# Altium PCB PCB1.PcbDoc
Units mm, origin at the board's own origin, x right, y up, seen from the top; angles counter-clockwise.
Board outline 152.4 x 101.6 mm, 2 copper layers (Top Layer, Bottom Layer); 22 components, 15 nets, 106 pads, 0 vias.
Unrouted connection lines stored in the file: 32.
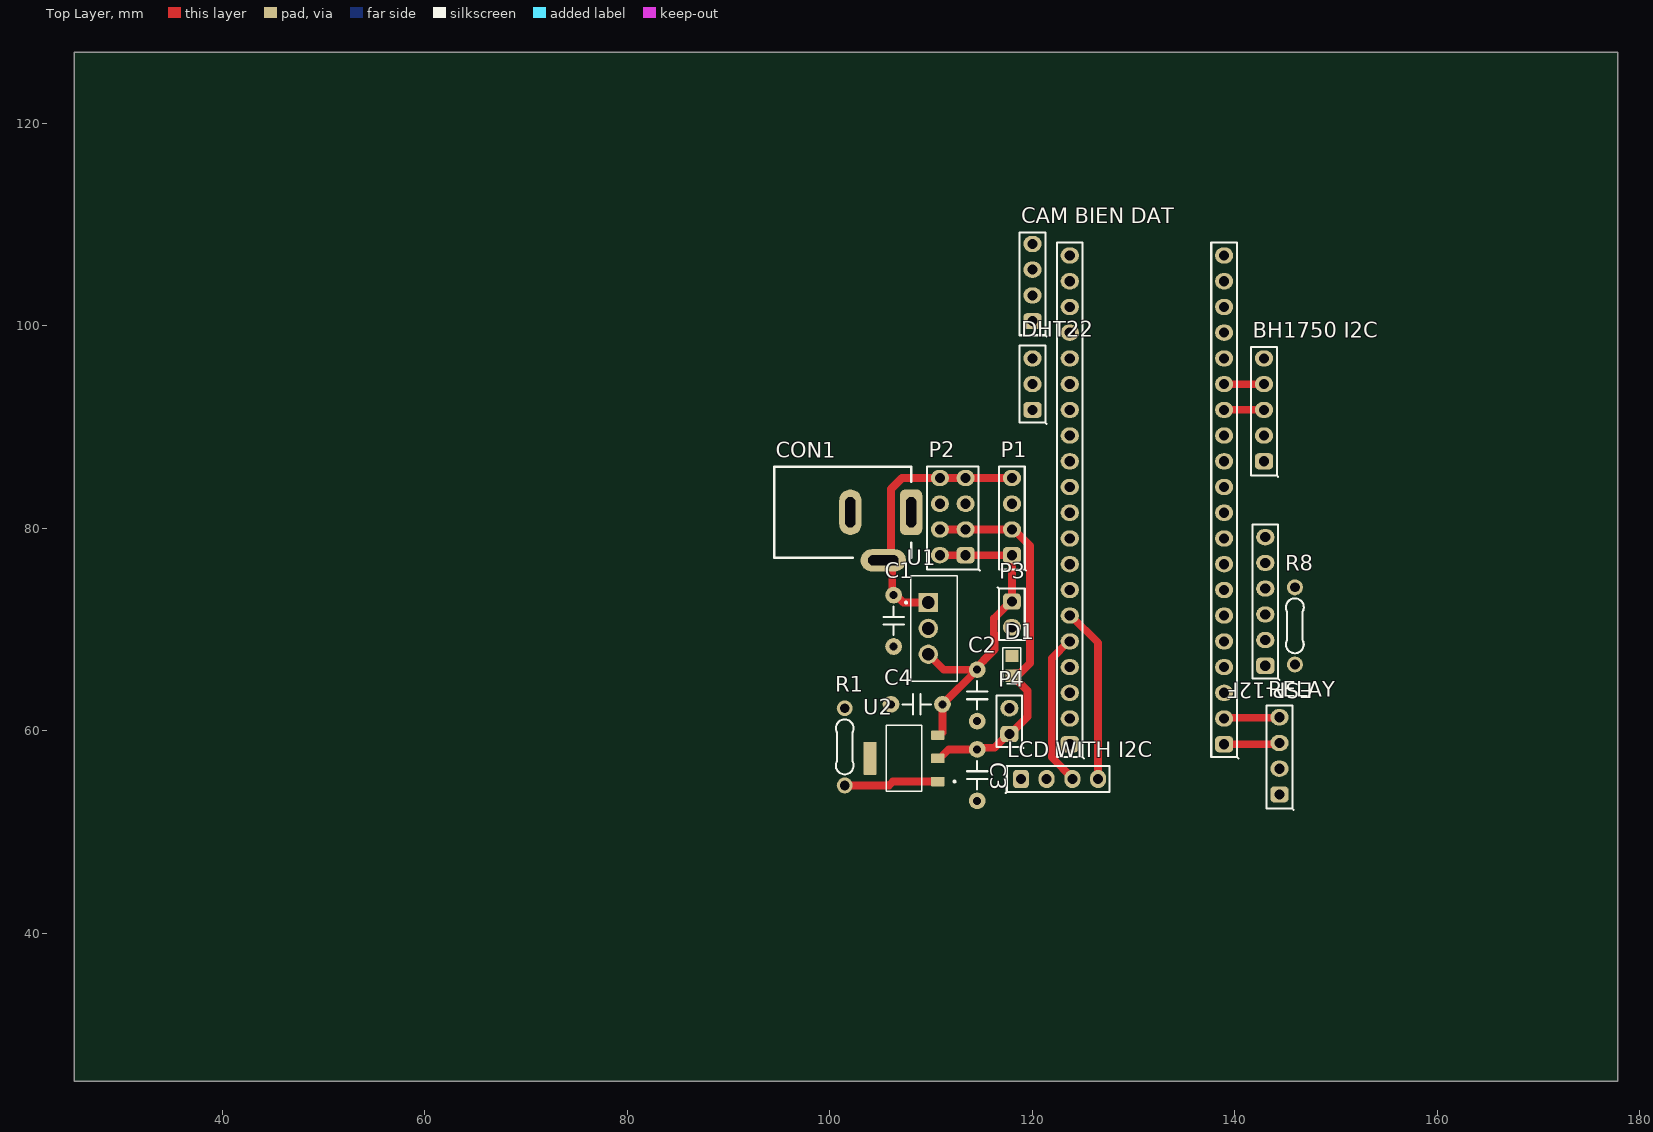
[diagram p0: Top Layer view]
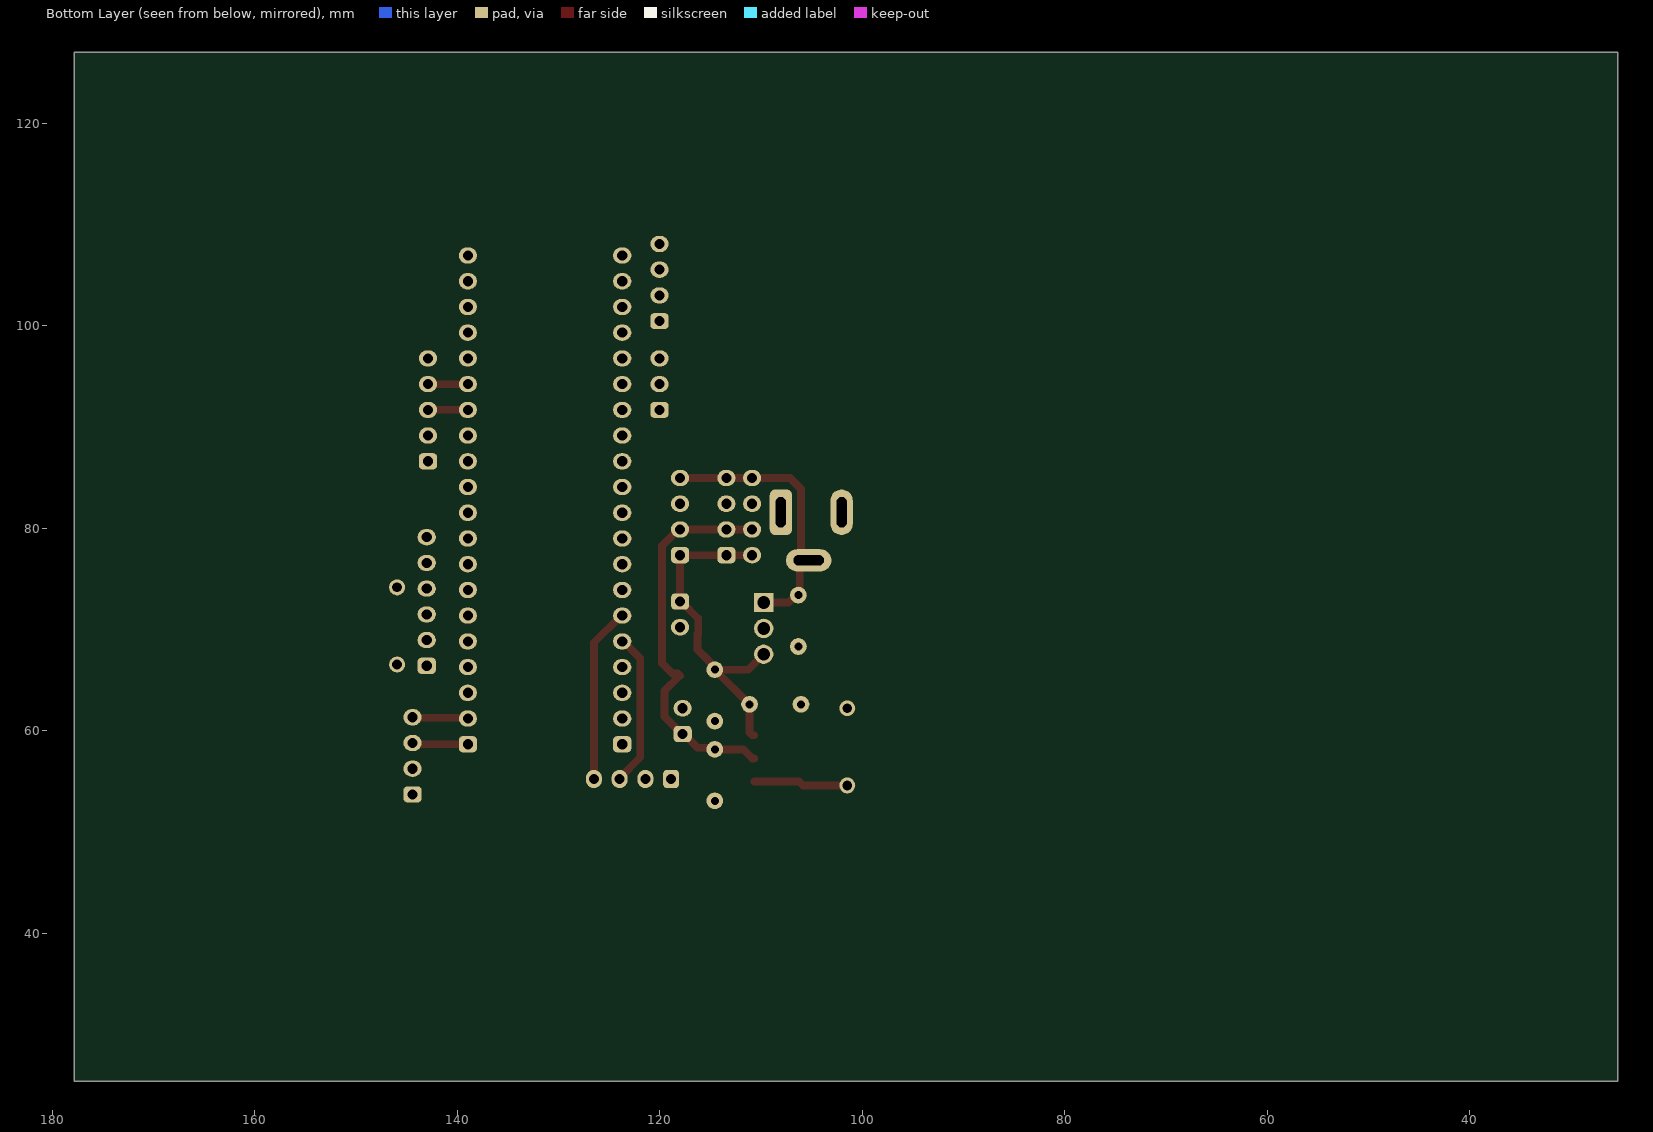
[diagram p1: Bottom Layer view, seen from below]

## Layer stack, top to bottom
Top Solder: solder mask 0.0102, Solder Resist, Dk 3.5
Top Layer: signal copper 0.0356
Dielectric 1: dielectric 0.32, FR-4, Dk 4.8
Bottom Layer: signal copper 0.0356
Bottom Solder: solder mask 0.0102, Solder Resist, Dk 3.5

## Board outline
25.4,25.4 177.8,25.4 177.8,127 25.4,127

## Design rules (kind name [scope] priority, off if disabled: settings)
Clearance [All] p1: gap=0.508 ignorepadtopadclearanceinfootprint=FALSE except(0.762: Arc-Fill Arc-Poly Arc-Region Track-Fill Track-Poly Track-Region SMDPad-Fill SMDPad-Poly SMDPad-Region THPad-Fill THPad-Poly THPad-Region Via-Fill Via-Poly Via-Region Fill-Fill Fill-Poly Fill-Region Poly-Poly Poly-Region Region-Region)
PolygonConnect [All] p1: connectstyle=Relief reliefconductorwidth=0.254 reliefentries=4 polygonreliefangle="90 Angle" airgapwidth=0.254
RoutingLayers [All] p1: top layer_v5=TRUE bottom layer_v5=FALSE
RoutingVias [All] p1: holewidth=0.711 width=1.27 viastyle="Through Hole" minholewidth=0.711 minwidth=1.27 maxholewidth=0.711 maxwidth=1.27
SolderMaskExpansion [All] p1: expansion=0.102 istentingtop=FALSE
SupplyNets "Schematic Supply Nets_2" [InNet('3.3V')] p1: voltage=0.000
SupplyNets "Schematic Supply Nets_1" [InNet('VCC')] p2: voltage=0.000
SupplyNets "Schematic Supply Nets_3" [InNet('5V')] p3: voltage=0.000
SupplyNets "Schematic Supply Nets" [InNet('GND')] p4: voltage=0.000
Width [All] p1: maxlimit=3.81 minlimit=0.711 preferedwidth=0.762
29 further rules are at their usual default settings.

## Classes and differential pairs
component class Sheet1: "BH1750 I2C" C1 C2 C3 C4 "CAM BIEN DAT" CON1 D1 DHT22 ESP-12F "LCD WITH I2C" P1 P2 P3 P4 R1 R8 RELAY U1 U2

## Components (designator, comment, footprint, x,y, rotation, side; value= is the part's Value field where it differs from the comment)
"BH1750 I2C" "BH1750 I2C" HDR/Header/5 142.875,91.694 r90 top
C1 "10uF" "CAP Ceramic/W200" 106.299,73.406 r270 top
C2 "10uF" "CAP Ceramic/W200" 114.554,66.04 r270 top
C3 "10uF" "CAP Ceramic/W200" 114.554,58.166 r270 top
C4 "10uF" "CAP Ceramic/W200" 111.125,62.611 r180 top
"CAM BIEN DAT" "CAM BIEN DAT" HDR/Header/4 120.015,104.267 r90 top
CON1 "CON DC PWR" CONN/DC/PWR/5.0MM 108.033,81.585 r0 top
D1 "Led" "Led 0805" 117.983,66.421 r90 top
DHT22 "DHT22" HDR/Header/3 120.015,94.234 r90 top
ESP-12F "" HDR/Header/6 143.002,72.771 r90 top
"LCD WITH I2C" "LCD WITH I2C" HDR/Header/4 122.682,55.245 r0 top
P1 "Header 4" HDR/Header/4 117.983,81.153 r90 top
P2 "Header 4X2" HDR/Header/8/DL 112.141,81.153 r90 top
P3 "Header 2" HDR/Header/2 117.983,71.501 r270 top
P4 "Header 2" HDR/Header/2 117.729,60.96 r90 top
R1 "0" "R 1/4W/300" 101.473,62.23 r270 top
R8 "10K" "R 1/4W/300" 145.923,66.548 r90 top
RELAY "RELAY" HDR/Header/4 144.399,57.531 r90 top
U1 "L7805ACV" "PCBComponent_1 - duplicate" 100.457,83.078 r0 top
U2 "AMS1117-3.3" SOT229P700X180-4N 107.315,57.277 r180 top
? "Header 20" HDR/Header/20 123.698,82.804 r90 top
? "Header 20" HDR/Header/20 138.938,82.804 r90 top

## Footprints (in the part's own frame and the unit in brackets; to place one, negate y for a bottom-side part, rotate by r counter-clockwise, add the part's x,y. Pads: shape width x height; smd on the part's side, far side on the other; paste and mask are expansions set on the pad)
"CAP Ceramic/W200" [mil]
  round 65 hole 31: 1(0,0) 2(200,0)
  silkscreen extent 45,-40 155,40, body extent -6,-42 206,41, height 181
CONN/DC/PWR/5.0MM [mm]
  rrect50% 2.2x4.5 hole 1 slot 3 at 90 deg: 1(0,0)
  oval 2.2x4.5 hole 1 slot 3 at 90 deg: 2(-6,0)
  oval 4.5x2.2 hole 1 slot 3 at 0 deg: 3(-2.75,-4.75)
  silkscreen extent -13.5,-4.5 0,4.5, body extent -13.58,-5 0.25,4.5, height 11.02
HDR/Header/2 [mm]
  rrect50% 1.6x1.8 hole 1: 1(-1.27,0)
  oval 1.6x1.8 hole 1: 2(1.27,0)
  silkscreen extent -2.67,-1.4 2.54,1.27, body extent -2.54,-1.27 2.54,1.27, height 8.89
HDR/Header/3 [mm]
  rrect50% 1.6x1.8 hole 1: 1(-2.54,0)
  oval 1.6x1.8 hole 1: 2(0,0) 3(2.54,0)
  silkscreen extent -3.94,-1.4 3.81,1.27, body extent -3.81,-1.27 3.81,1.27, height 8.89
HDR/Header/4 [mm]
  rrect50% 1.6x1.8 hole 1: 1(-3.81,0)
  oval 1.6x1.8 hole 1: 2(-1.27,0) 3(1.27,0) 4(3.81,0)
  silkscreen extent -5.33,-1.4 4.95,1.27, body extent -5.08,-1.27 5.08,1.27, height 8.89
HDR/Header/5 [mm]
  rrect50% 1.6x1.8 hole 1: 1(-5.08,0)
  oval 1.6x1.8 hole 1: 2(-2.54,0) 3(0,0) 4(2.54,0) 5(5.08,0)
  silkscreen extent -6.6,-1.4 6.22,1.27, body extent -6.35,-1.27 6.35,1.27, height 8.89
HDR/Header/6 [mm]
  rrect50% 1.6x1.8 hole 1: 1(-6.35,0)
  oval 1.6x1.8 hole 1: 2(-3.81,0) 3(-1.27,0) 4(1.27,0) 5(3.81,0) 6(6.35,0)
  silkscreen extent -7.75,-1.4 7.62,1.27, body extent -7.62,-1.27 7.62,1.27, height 8.38
HDR/Header/8/DL [mm]
  rrect50% 1.6x1.8 hole 1: 1(-3.81,-1.27)
  oval 1.6x1.8 hole 1: 2(-3.81,1.27) 3(-1.27,-1.27) 4(-1.27,1.27) 5(1.27,-1.27) 6(1.27,1.27) 7(3.81,-1.27) 8(3.81,1.27)
  silkscreen extent -5.33,-2.67 4.95,2.54, body extent -5.08,-2.54 5.08,2.54, height 8.89
HDR/Header/20 [mm]
  rrect50% 1.6x1.8 hole 1: 1(-24.13,0)
  oval 1.6x1.8 hole 1: 2(-21.59,0) 3(-19.05,0) 4(-16.51,0) 5(-13.97,0) 6(-11.43,0) 7(-8.89,0) 8(-6.35,0) 9(-3.81,0) 10(-1.27,0) 11(1.27,0) 12(3.81,0) 13(6.35,0) 14(8.89,0) 15(11.43,0) 16(13.97,0) 17(16.51,0) 18(19.05,0) 19(21.59,0) 20(24.13,0)
  silkscreen extent -25.53,-1.4 25.4,1.27, body extent -25.4,-1.27 25.4,1.27, height 8.89
"Led 0805" [mm] "Led SMD 0805"
  rect 1.2x1.3 smd: 1(-0.975,0) 2(0.975,0)
  silkscreen extent -1.78,-0.89 1.78,0.89, body extent -1.01,-0.64 1.01,0.61, height 1.1
"PCBComponent_1 - duplicate" [mm]
  rect 1.91x1.91 / inner round 1.91 / far side rect 1.91x1.91 hole 1.27: 1(9.271,-10.414)
  round 1.91 hole 1.27: 2(9.271,-12.964) 3(9.271,-15.514)
  silkscreen extent 6.98,-18.16 12.13,-7.76, body extent 7.62,-17.97 12.06,-8, height 19.68
"R 1/4W/300" [mil] "Through hole resitor, axial 300mils, 1/4W"
  round 62 hole 38: 1(0,0) 2(300,0)
  silkscreen extent 44,-35 257,35, body extent -12,-47 312,47, height 97
SOT229P700X180-4N [mm]
  rrect15% 1.31x0.93 smd: 1(-3.345,2.29) 2(-3.345,0) 3(-3.345,-2.29)
  rrect15% 1.31x3.24 smd: 4(3.345,0)
  silkscreen extent -5.1,-3.25 1.75,3.25, body extent -3.5,-3.25 3.5,3.25, height 1.8

## Part data
C1 C2 C3 C4: library part "Capacitor NP", "Capacitor non-pol"
CON1: "DC input connector"
D1: "Typical LED"
ESP-12F: library part ESP12-F
"LCD WITH I2C": library part Component_1
P1: "Header, 4-Pin"
P2: "Header, 4-Pin, Dual row"
P3 P4: "Header, 2-Pin"
R1 R8: library part Resistor, "Resistor"
U1: library part CMP-0244-00484-1, "Positive Voltage Regulator, 5V, 3-Pin TO-220", ComponentLink1Description="Manufacturer URL", ComponentLink1URL=http://www.st.com, ComponentLink2Description=Datasheet, ComponentLink2URL=http://www.st.com/internet/com/TECHNICAL_RESOURCES/TECHNICAL_LITERATURE/DATASHEET/CD00000444.pdf, ComponentLink3Description="Package Specification", ComponentLink3URL=http://www.st.com/internet/com/TECHNICAL_RESOURCES/TECHNICAL_LITERATURE/PACKAGE_INFORMATION/CD00004649.pdf, DatasheetVersion=16/11/2011, PackageDescription="TO, Thru-Hole, Vertical, Heatsink Mounted; 3 In-Line Leads; Pitch 2.54 mm", PackageReference=TO220, PackageVersion=ver3.0
U2: "Sot223/Pkg 1-Amp 3.3-Volt Low Drop Out Voltage Regulatator", Package="SOT-223 Seeed Technology", Availability="Not in stock", Check_prices=https://www.snapeda.com/parts/AMS1117-3.3/Advanced+Monolithic+Systems/view-part/?ref=eda, MF="Advanced Monolithic Systems", MP=AMS1117-3.3, Price=None, SnapEDA_Link=https://www.snapeda.com/parts/AMS1117-3.3/Advanced+Monolithic+Systems/view-part/?ref=snap

## Nets (pads, with @x,y where several pads share a name; then routed paths per layer and width w, separated by ;. In a path a pad name is that pad's centre, name@x,y a point inside that pad or via, vN(x,y) a via of type N, cw(c..) or ccw(c..) an arc to the next point about the centre after c; other vN are vias at no path point)
3.3V: "BH1750 I2C.1" "CAM BIEN DAT.1" C3.1 D1.1 DHT22.1 ESP-12F.1 ESP-12F.6 P1.2 P2.3 P2.4 P4.1 R8.1 U2.2 | length 39.1
  Top Layer w0.762: U2.2 110.85,57.277 111.739,58.166 C3.1 114.724,58.336 116.265,58.336 117.619,59.69 P4.1 117.829,59.69 119.518,61.379 119.518,63.961 118.033,65.446 D1.1 118.202,65.665 118.759,65.665 119.772,66.678 119.772,78.277 118.166,79.883 P1.2 ; P2.4 P2.3 P1.2 ; P1.2@118.083,79.883 P1.2 ; R8.1@145.703,66.548 R8.1
5V: "LCD WITH I2C.2" C2.1 C4.1 P1.1 P2.1 P2.2 P3.1 RELAY.1 U1.3 U2.3 | length 33.7
  Top Layer w0.762: U1.3 111.252,66.04 C2.1 ; U2.3 110.85,59.567 111.125,59.842 C4.1 ; P2.2 P2.1 P1.1 P3.1 117.883,72.771 116.194,71.082 116.194,69.619 116.268,69.544 116.268,68.035 115.174,66.94 115.174,66.901 114.554,66.281 C2.1 ; C4.1@111.061,62.674 C4.1 ; C4.1 C2.1
A0: "CAM BIEN DAT.4" ?.16@123.698,96.774 | length 0.1
  Top Layer w0.762: ?.16@123.598,96.774 ?.16@123.698,96.774
A1: ?.15@123.698,94.234 DHT22.2 | length 0.1
  Top Layer w0.762: ?.15@123.634,94.297 ?.15@123.698,94.234
A9: ?.6@138.938,71.374 ESP-12F.3
A10: ?.7@138.938,73.914 ESP-12F.4
B6: "BH1750 I2C.3" ?.14@138.938,91.694 | length 4.1
  Top Layer w0.762: ?.14@138.838,91.694 ?.14@138.938,91.694 ; ?.14@139.038,91.694 ?.14@138.938,91.694 ; 142.875,91.694 ?.14@138.938,91.694
B7: "BH1750 I2C.4" ?.15@138.938,94.234 | length 4.3
  Top Layer w0.762: ?.15@139.038,94.234 ?.15@138.938,94.234 ; ?.15@139.098,94.074 ?.15@138.938,94.234 ; 142.875,94.234 ?.15@138.938,94.234
B10: "LCD WITH I2C.4" ?.6@123.698,71.374 | length 17.3
  Top Layer w0.762: ?.6@123.698,71.374 123.798,71.374 126.492,68.68 126.492,55.245
B11: "LCD WITH I2C.3" ?.5@123.698,68.834 | length 15.2
  Top Layer w0.762: ?.5@123.698,68.834 123.598,68.834 121.909,67.145 121.909,57.388 123.952,55.345 123.952,55.245
B12: ?.1@138.938,58.674 RELAY.3 | length 4.7
  Top Layer w0.762: ?.1@138.938,58.674 RELAY.3@143.637,58.674
B13: ?.2@138.938,61.214 RELAY.4 | length 5.5
  Top Layer w0.762: ?.2@138.938,61.214 139.001,61.277 144.335,61.277 RELAY.4
GND: "BH1750 I2C.2" "CAM BIEN DAT.2" "LCD WITH I2C.1" C1.2 C2.2 C3.2 C4.2 CON1.2 D1.2 DHT22.3 ESP-12F.2 ESP-12F.5 P1.3 P2.5 P2.6 P3.2 P4.2 R1.1 R8.2 RELAY.2 U1.2
NetR1_2: R1.2 U2.1 | length 9.3
  Top Layer w0.762: R1.2 105.851,54.61 106.228,54.987 U2.1
VCC: C1.1 CON1.3 P1.4 P2.7 P2.8 U1.1 | length 27.5
  Top Layer w0.762: U1.1 107.282,72.664 106.54,73.406 C1.1 106.176,73.529 106.176,76.171 105.511,76.835 CON1.3 105.38,76.835 106.044,77.499 106.044,83.881 107.126,84.963 P2.8 P2.7 P1.4
pads on no net: "BH1750 I2C.5" "CAM BIEN DAT.3" ?.1@123.698,58.674 ?.2@123.698,61.214 ?.3 ?.4 ?.5@138.938,68.834 ?.7@123.698,73.914 ?.8 ?.9 ?.10 ?.11 ?.12 ?.13 ?.14@123.698,91.694 ?.16@138.938,96.774 ?.17 ?.18 ?.19 ?.20 CON1.1 U2.4